# Altium PCB 2011_bms_slave_board.PcbDoc
Units mm, origin at the board's own origin, x right, y up, seen from the top; angles counter-clockwise.
Board outline 64 x 25 mm, 2 copper layers (Top Layer, Bottom Layer); 77 components, 77 nets, 239 pads, 64 vias.
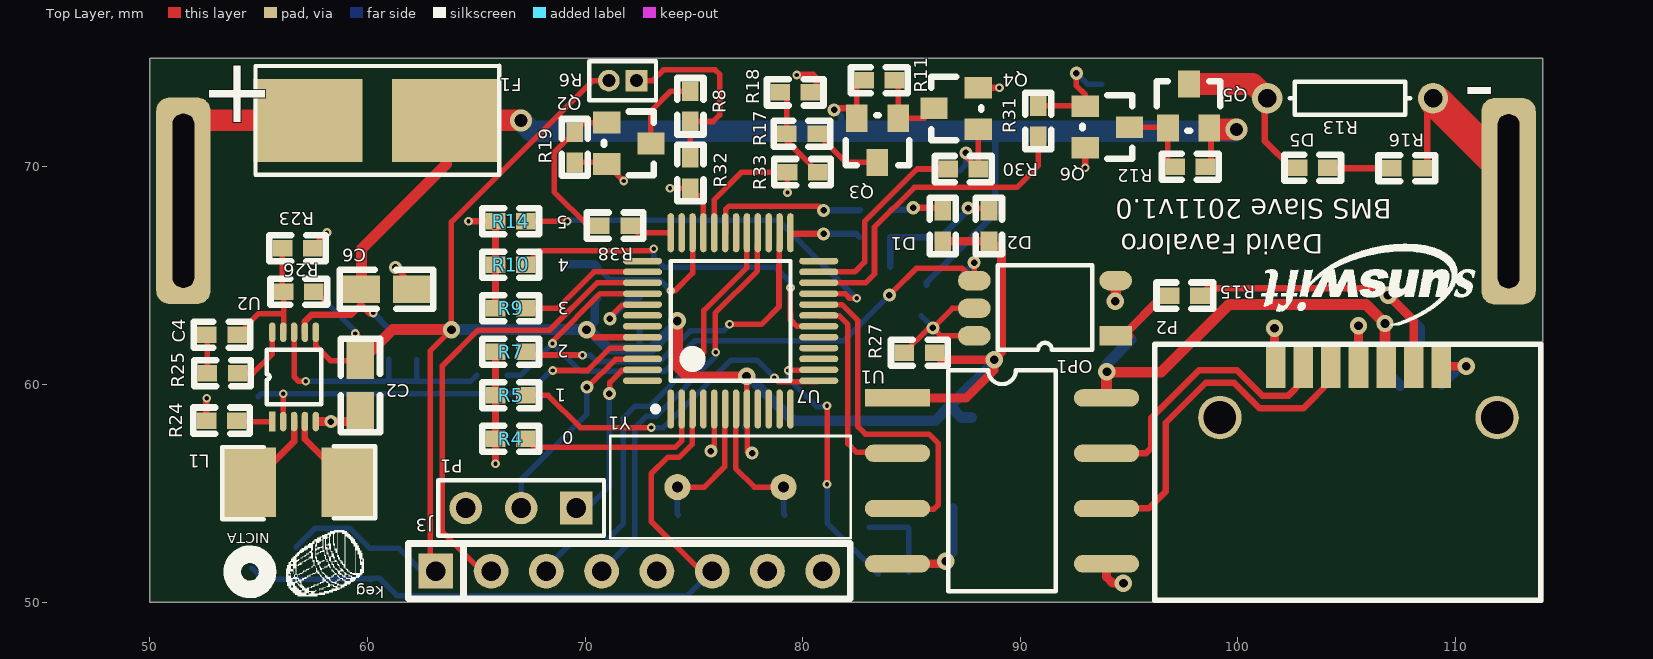
[diagram p0: Top Layer view]
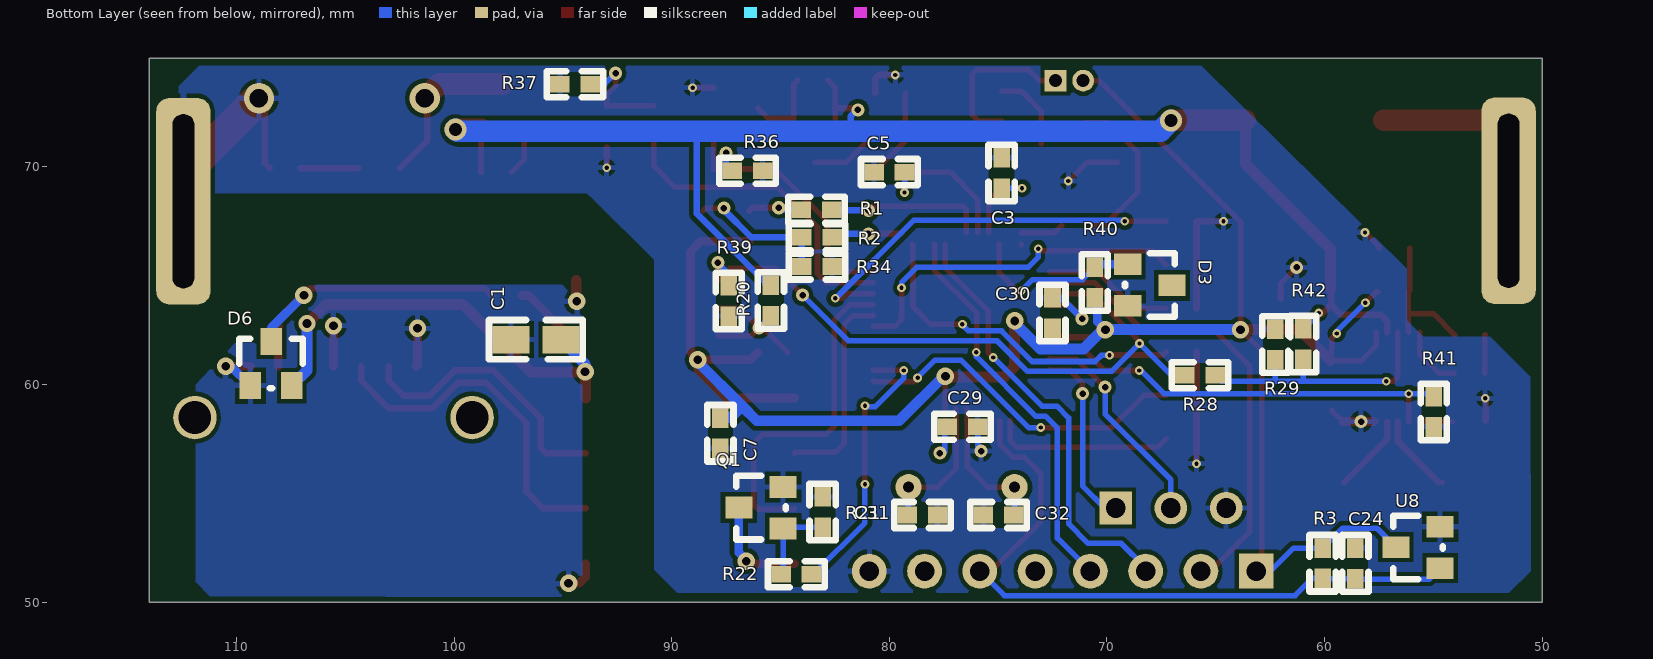
[diagram p1: Bottom Layer view, seen from below]

## Layer stack, top to bottom
Top Layer: signal copper 0.0356
Dielectric: dielectric 0.32, FR-4, Dk 4.8
Bottom Layer: signal copper 0.0356

## Board outline
50,50 50,75 114,75 114,50

## Design rules (kind name [scope] priority, off if disabled: settings)
Clearance [All] p1: gap=0.2
ComponentClearance [All] p1 off: gap=0.254 collisioncheckmode=3 verticalgap=0.254 showdistances=FALSE
HoleSize [All] p1: absolutevalues=TRUE maxlimit=2.54 minlimit=0 maxpercent=80.000 minpercent=20.000
MinimumAnnularRing [All] p1: minimumring=0.1
MinimumSolderMaskSliver [All] p1 off: minsoldermaskwidth=0.2
PolygonConnect [All] p1: connectstyle=Relief reliefconductorwidth=0.254 reliefentries=4 polygonreliefangle="90 Angle"
RoutingVias [All] p1: holewidth=0.2 width=0.4 viastyle="Through Hole" minholewidth=0.2 minwidth=0.4 maxholewidth=0.8 maxwidth=1
SilkToSilkClearance [All] p1 off: silktosilkclearance=0.2
SilkscreenOverComponentPads [All] p1 off: minsilkscreentomaskgap=0.254
SolderMaskExpansion [All] p1: expansion=0.102
TestPointUsage [All] p1: valid=0 allowmultiple=FALSE
Testpoint [All] p1: side=15 testpointundercomponent=TRUE minsize=1.016 maxsize=2.54 preferedsize=1.524 minholesize=0 maxholesize=1.016 preferedholesize=0.813 testpointgrid=0.025 style=1023 order=0-112345678
Width [All] p1: maxlimit=2 minlimit=0.254 preferedwidth=0.254
19 further rules are at their usual default settings.

## Classes and differential pairs
component class Battery: D5 F1 Q3 Q4 Q5 Q6 R11 R12 R13 R16 R17 R18 R30 R31 R36 R37
component class LPC11C14: C24 C29 C30 C31 C32 C33 J3 R3 U7 U8 Y1
component class PowerSupply: C2 C4 C6 L1 R23 R24 R25 R26 R29 R41 R42 U2
component class TopLevel: + - C1 C3 C5 C7 D1 D2 D3 D6 H1 H2 H3 H4 J1 OP1 P1 P2 P4 P? Q1 Q2 R1 R2 R4 R5 R6 R7 R8 R9 R10 R14 R15 R19 R20 R21 R22 R27 R28 R32 R33 R34 R38 R39 R40 U1

## Components (designator, comment, footprint, x,y, rotation, side; value= is the part's Value field where it differs from the comment)
+ "tab_connection" tab_connect 55.94,71.04 r90 top
- "tab_connection" tab_connect 116.84,71.02 r90 top
C1 "4.7uF" 0805 95.094,62.06 r0 bottom
C2 "4.7uF" 0805 59.674,61.096 r270 top
C3 "100nF" 0603 74.84,69.02 r90 bottom
C4 "1.5nF" 0603 52.62,62.28 r0 top
C5 "100nF" 0603 79.3,69.76 r0 bottom
C6 "4.7uF" 0805 59.73,64.372 r0 top
C7 "100nF" 0603 87.76,58.457 r270 bottom
C24 "10nF" 0603 58.58,51.08 r90 bottom
C29 "100nF" 0603 77.334,58.06 r180 bottom
C30 "100nF" 0603 72.5,63.977 r270 bottom
C31 "18pF" 0603 79.177,54 r180 bottom
C32 "18pF" 0603 74.283,54 r0 bottom
D1 "LED Orange" 0603_LED 87.09,66.03 r90 top
D2 "LED Red" 0603_LED 89.21,66.03 r90 top
D3 "LM4040" SOT23-3 69.04,65.52 r270 bottom
D5 "LED Green" 0603_LED 102.19,69.31 r0 top
D6 "BAV99" BAV99 110.015,59.248 r180 bottom
F1 "FUSE" LITTELFUSE-154 60.452,72.136 r180 top
J3 "LPC SWD Connector" IDC8 63.14,51.42 r0 top
L1 "4.7uH" 1812 59.094,55.508 r180 top
OP1 "VOM452T" VOM452T 95.134,62.18 r180 top
P1 "Header 3" HDR1X3 69.6,54.32 r180 top
P2 "SATA" 47080-4005-SATA 99.17,58.48 r0 top
Q1 "ZXM61N02F" SOT23-3 84.882,53.385 r90 bottom
Q2 "ZXM61N02F" SOT23-3 70.993,72.033 r270 top
Q3 "ZXM61P03F" SOT23-3 84.389,72.236 r180 top
Q4 "ZXM61N02F" SOT23-3 88.072,71.728 r90 top
Q5 "ZXM61P03F" SOT23-3 96.783,71.78 r0 top
Q6 "ZXM61N02F" SOT23-3 92.988,72.785 r270 top
R1 "100R" 0603 82.64,68.02 r0 bottom
R2 "100R" 0603 82.623,66.76 r0 bottom
R3 "10k" 0603 60.087,51.083 r90 bottom
R4 "0R" 0603 67.28,57.5 r180 top
R5 "0R" 0603 67.28,59.5 r180 top
R6 "NTC" MHDR1X2 72.36,73.96 r180 top
R7 "0R" 0603 67.28,61.5 r180 top
R8 "1K" 0603 74.84,72.083 r90 top
R9 "0R" 0603 67.28,63.5 r180 top
R10 "0R" 0603 67.28,65.5 r180 top
R11 "10k" 0603 82.82,73.98 r0 top
R12 "10k" 0603 97.112,70.003 r0 top
R13 "100R" AXIAL-0.3 105.156,73.152 r180 top
R14 "0R" 0603 67.28,67.5 r180 top
R15 "2k" 0603 96.861,64.083 r0 top
R16 "1k0" 0603 108.464,69.934 r180 top
R17 "10k0 1%" 0603 79.268,71.524 r0 top
R18 "30k, 1%" 0603 80.357,73.42 r180 top
R19 "10K" 0603 69.52,71.597 r270 top
R20 "0R" 0603 85.44,64.56 r270 bottom
R21 "10K" 0603 83.066,53.441 r90 bottom
R22 "100R" 0603 83.574,51.282 r0 bottom
R23 "200k" 0603 57.49,66.26 r180 top
R24 "20k" 0603 53.997,58.34 r180 top
R25 "15k" 0603 54.037,60.52 r180 top
R26 "340k" 0603 56.143,64.26 r0 top
R27 "0R" 0603 86.06,61.46 r180 top
R28 "0R" 0603 65.02,60.42 r0 bottom
R29 "10k" 0603 62.268,62.54 r270 bottom
R30 "100R" 0603 86.68,69.9 r0 top
R31 "100R" 0603 90.82,71.4 r90 top
R32 "1K" 0603 74.84,70.417 r270 top
R33 "1K" 0603 80.697,69.76 r180 top
R34 "100R" 0603 82.623,65.42 r0 bottom
R36 "10k" 0603 85.823,69.82 r0 bottom
R37 "10k" 0603 95.14,73.8 r180 bottom
R38 "100R" 0603 72.08,67.3 r180 top
R39 "1K" 0603 87.38,64.54 r270 bottom
R40 "1k" 0603 70.56,63.983 r90 bottom
R41 "10k" 0603 54.98,59.44 r270 bottom
R42 "10k" 0603 60.98,61.163 r90 bottom
U1 "ISO1050" SOP8 84.36,59.38 r0 top
U2 "LTC3440" MSOP10 55.626,58.296 r90 top
U7 "LPC11C14" QFP48-long 76,62.92 r90 top
U8 "XC61CN2002MR" SOT23-3 54.688,51.555 r90 bottom
Y1 "12 MHz" HC49/4H 71.155,55.28 r0 top

## Footprints (in the part's own frame and the unit in brackets; to place one, negate y for a bottom-side part, rotate by r counter-clockwise, add the part's x,y. Pads: shape width x height; smd on the part's side, far side on the other; paste and mask are expansions set on the pad)
0603 [mil]
  rect 35.43x30 smd: 1(0,0) 2(55,0)
  silkscreen extent -24,-24 79,24
0603_LED [mm]
  rect 0.9x0.762 smd: A(0.55,0.65) K(1.947,0.65)
  silkscreen extent -0.05,0.05 2.55,1.25
0805 [mm]
  rect 1.7x1.27 smd: 1(0,0) 2(2.286,0)
  silkscreen extent -1,-0.9 3.3,0.9
1812 [mm]
  rect 2.4x3.2 smd: 1(0,0) 2(4.5,0)
  silkscreen extent -1.27,-1.66 5.77,1.7
47080-4005-SATA [mm]
  round 2 hole 1.5: 0(0,0) 0(12.74,0)
  rect 0.9x2 smd: 1(2.56,2.36) 2(3.83,2.36) 3(5.1,2.36) 4(6.37,2.36) 5(7.64,2.36) 6(8.91,2.36) 7(10.18,2.36)
  silkscreen extent -3,-8.4 14.74,3.36
AXIAL-0.3 [mm] "Resistor; 2 Leads"
  round 1.4 hole 0.85: 1(-3.81,0) 2(3.81,0)
  silkscreen extent -2.77,-0.76 2.77,0.76
BAV99 [mm]
  rect 1x1.25 smd: A(0.65,0.7) C(1.615,2.732) K(2.555,0.7)
  silkscreen extent 0.14,0.57 3.06,2.86
HC49/4H [mm]
  round 1.2 hole 0.5: 1(3.085,0) 2(7.965,0)
  silkscreen extent 0,-2.35 11.05,2.35
HDR1X3 [mm] "Connector; Header; 3 Position"
  rect 1.5x1.5 hole 0.9: 1(0,0)
  round 1.5 hole 0.9: 2(2.54,0) 3(5.08,0)
  silkscreen extent -1.27,-1.27 6.35,1.27
IDC8 [mm]
  rect 1.6x1.6 hole 0.9: 1(0,0)
  round 1.6 hole 0.9: 2(2.54,0) 3(5.08,0) 4(7.62,0) 5(10.16,0) 6(12.7,0) 7(15.24,0) 8(17.78,0)
  silkscreen extent -1.27,-1.27 19.05,1.27
LITTELFUSE-154 [mm]
  rect 5x3.81 smd: 1(-3.185,0) 2(3.185,0)
  silkscreen extent -5.6,-2.51 5.6,2.5
MHDR1X2 [mm] "Connector; Header; 2 Position"
  rect 1x1 hole 0.6: 1(0,0)
  round 1 hole 0.6: 2(1.27,0)
  silkscreen extent -0.9,-0.9 2.17,0.9
MSOP10 [mm]
  rect 0.9x0.3 smd: 1(0,0)
  oval 0.9x0.3 smd: 2(0,-0.5) 3(0,-1) 4(0,-1.5) 5(0,-2) 6(4.1,-2) 7(4.1,-1.5) 8(4.1,-1) 9(4.1,-0.5) 10(4.1,0)
  silkscreen extent 0.8,-2.25 3.3,0.25
QFP48-long [mm]
  oval 1.8x0.3 smd: 1(-4.048,2.063) 2(-4.048,1.563) 3(-4.048,1.063) 4(-4.048,0.563) 5(-4.048,0.063) 6(-4.048,-0.437) 7(-4.048,-0.937) 8(-4.048,-1.437) 9(-4.048,-1.937) 10(-4.048,-2.437) 11(-4.048,-2.937) 12(-4.048,-3.437) 25(4.052,-3.437) 26(4.052,-2.937) 27(4.052,-2.437) 28(4.052,-1.937) 29(4.052,-1.437) 30(4.052,-0.937) 31(4.052,-0.437) 32(4.052,0.063) 33(4.052,0.563) 34(4.052,1.063) 35(4.052,1.563) 36(4.052,2.063)
  oval 0.3x1.8 smd: 13(-2.748,-4.737) 14(-2.248,-4.737) 15(-1.748,-4.737) 16(-1.248,-4.737) 17(-0.748,-4.737) 18(-0.248,-4.737) 19(0.252,-4.737) 20(0.752,-4.737) 21(1.252,-4.737) 22(1.752,-4.737) 23(2.252,-4.737) 24(2.752,-4.737) 37(2.752,3.363) 38(2.252,3.363) 39(1.752,3.363) 40(1.252,3.363) 41(0.752,3.363) 42(0.252,3.363) 43(-0.248,3.363) 44(-0.748,3.363) 45(-1.248,3.363) 46(-1.748,3.363) 47(-2.248,3.363) 48(-2.748,3.363)
  silkscreen extent -4.17,-3.44 2.75,2.89, body extent -3.5,-4.19 3.5,2.81, height 1.6
SOP8 [mm]
  rect 3x0.8 smd: 1(0,0)
  oval 3x0.8 smd: 2(0,-2.54) 3(0,-5.08) 4(0,-7.62) 5(9.6,-7.62) 6(9.6,-5.08) 7(9.6,-2.54) 8(9.6,0)
  silkscreen extent 2.33,-8.89 7.27,1.27
SOT23-3 [mm]
  rect 1x1.25 smd: 1(0,0) 2(1.905,0) 3(0.965,2.032)
  silkscreen extent -0.51,-0.13 2.41,2.16
tab_connect [mm]
  rrect50% 9.5x2.5 hole 1 slot 8 at 0 deg: 0(-2.6,4.4)
VOM452T [mm]
  rect 1.5x0.9 smd: 1(0.75,-0.05)
  oval 1.5x0.9 smd: 3(0.75,-2.59) 4(7.25,-2.59) 5(7.25,-1.32) 6(7.25,-0.05)
  silkscreen extent 1.84,-3.3 6.16,0.59

## Part data
C1 C2 C3 C4 C5 C6 C7 C24 C29 C30 C31 C32: library part CAP, "Capacitor"
D1 D2: library part LED
D5: library part LED, "HSMG-C170, Green LED"
D6: library part "DIODE SERIES 2", "diode, series connected"
F1: "Fuse"
J3: library part LPCLink_Connector
L1: library part Inductor, "Inductor"
P1: "Header, 3-Pin"
Q1 Q2 Q4 Q6: "1.7A, 20V N-Channel Enhancement mode FET"
Q3 Q5: "1.1A, 30V P-Channel Enhancement mode FET"
R1 R2 R3 R4 R5 R7 R8 R9 R10 R11 R12 R14 R15 R16 R17 R18 R19 R20 R21 R22 R23 R24 R25 R26 R27 R28 R29 R30 R31 R32 R33 R34 R36 R37 R38 R39 R40 R41 R42: library part RES1, "Resistor"
R6: "Thermistor, NTC"
R13: library part RES1, "Resistor, 100R, 1W, 10V"
U7: library part LPC11C14_Full
U8: library part XC61F, "SOT23 reset generator"
Y1: library part CRYSTAL, "Crystal"

## Free pads (board coordinates)
  round 0.809 on Top Overlay mask+0.2: 2(53.05,51.513)

## Via types
v1: diameter 0.4, hole 0.2, Top Layer to Bottom Layer, 29 vias
v2: diameter 0.6, hole 0.3, Top Layer to Bottom Layer, 15 vias
v3: diameter 0.8, hole 0.4, Top Layer to Bottom Layer, 14 vias
v4: diameter 0.6, hole 0.3, Top Layer to Bottom Layer, tented top, 2 vias
v5: diameter 1, hole 0.6, Top Layer to Bottom Layer, 2 vias
v6: diameter 0.4, hole 0.2, Top Layer to Bottom Layer, tented top, 2 vias

## Nets (pads, with @x,y where several pads share a name; then routed paths per layer and width w, separated by ;. In a path a pad name is that pad's centre, name@x,y a point inside that pad or via, vN(x,y) a via of type N, cw(c..) or ccw(c..) an arc to the next point about the centre after c; other vN are vias at no path point)
3V3: C2.1 C7.1 C29.1 C30.2 D1.A D2.A J3.1 R3.2 R6.2 R26.2 R27.1 R40.1 U1.1 U2.6 U7.8 U7.44 U8.3 | length 103.5
  Top Layer w0.254: R26.2 57.62,64.26 v1(58.12,63.76) ; U2.6 57.626,61.77 58.3,61.096 C2.1 C2.1@59.698,61.12 ; v1(59.443,62.343) 59.674,62.112 C2.1@59.698,61.12 ; C2.1@59.699,61.097 C2.1@59.698,61.12 ; C2.1@59.918,61.34 C2.1@59.698,61.12 ; J3.1 62.88,51.68 62.88,61.54 v3(63.86,62.52) 63.86,67.465 70.355,73.96 R6.2 ; v3@77.39,60.35 77.437,60.303 U7.8 ; U7.8@77.437,58.332 77.46,58.309 77.46,56.9 77.52,56.84 v4(77.68,56.84)
  Top Layer w0.3: C2.1 59.699,61.096 C2.1@59.736,61.096 ; v3(70.067,62.52) 70.416,62.172 U7.44
  Top Layer w0.4: U1.1 87.52,59.38 88.8,60.66 v3(88.8,61.14) ; R27.1 86.38,61.14 v3(88.8,61.14) ; D1.A D2.A 88.66,66.58 89.14,66.1 89.14,61.48 v3(88.8,61.14) ; v3@88.98,61.1 88.94,61.14 v3(88.8,61.14)
  Top Layer w0.5: C2.1@59.736,61.096 61.16,62.52 v3(63.86,62.52) ; v3(74.24,62.92) 74.24,60.821 74.711,60.35 v3@77.39,60.35
  Bottom Layer w0.254: U8.3 57.6,53.4 59.167,53.4 R3.2 61.42,52.48 J3.1@62.48,51.42 ; v1(58.12,63.76) 59.443,62.437 v1(59.443,62.343) ; 72.5,61.632 C30.2 ; C29.1 77.46,57.934 77.46,56.9 77.52,56.84 v4(77.68,56.84)
  Bottom Layer w0.4: v3(70.067,62.52) 70.44,62.893 70.44,63.863 R40.1
  Bottom Layer w0.5: v3(63.86,62.52) 68.221,62.52 ; 68.231,62.53 68.769,62.53 ; 68.779,62.52 v3(70.067,62.52) 70.18,62.52 71.068,61.632 72.5,61.632 73.052,61.632 v3@74.29,62.87 ; v3(77.42,60.38) 77.5,60.38 79.55,58.33 86.09,58.33 86.765,59.005 ; C7.1@87.76,58.48 87.289,58.48 86.765,59.005 ; v3(88.8,61.14) 88.8,61.04 86.765,59.005
/RESET: C24.1 J3.6 R3.1 U7.3 U8.1 | length 31.7
  Top Layer w0.254: U7.3@74.937,58.332 74.914,58.309 74.914,57.242 74.323,56.651 73.791,56.651 73.04,55.9 73.04,53.7 75.32,51.42 J3.6
  Bottom Layer w0.254: U8.1 55.188,51.055 58.555,51.055 C24.1 60.084,51.08 R3.1 ; R3.1@60.15,51.02 R3.1 ; J3.6 74.713,50.293 61.353,50.293 60.563,51.083 R3.1
BURSTMODE: R41.1 U2.2 U7.45 | length 20
  Top Layer w0.254: U2.2 v1(56.126,59.576) ; v1(68.52,60.64) 70.118,60.64 71.149,61.672 U7.45
  Bottom Layer w0.254: R41.1 55.116,59.576 v1(56.126,59.576) ; v1@56.182,59.52 v1(56.126,59.576) ; v1(68.52,60.64) 68.48,60.68 67.376,59.576 v1(56.126,59.576)
CAN_EN: R22.1 U7.14 | length 12.8
  Top Layer w0.254: v1(79.34,60.64) 79.34,60.62 79.368,60.649 80.714,60.649 U7.14 ; v6(81.12,55.42) v1(81.12,59.02)
  Bottom Layer w0.254: v1(79.34,60.64) 79.34,60.28 80.64,58.98 v1@81.08,58.98 ; v6(81.12,55.42) 81.12,53.64 R22.1@83.478,51.282
CAN_RX: U1.2 U7.19 | length 9.5
  Top Layer w0.254: U7.19 80.76,63.149 81.685,63.149 82.079,62.755 82.079,57.281 82.48,56.88 84.32,56.88 U1.2
CAN_TX: U1.3 U7.20 | length 15.8
  Top Layer w0.254: U7.20 81.804,63.672 82.533,62.943 82.533,58.067 82.88,57.72 85.8,57.72 86.22,57.3 86.22,54.46 86.02,54.26 84.4,54.26 U1.3
CANH: P2.2 U1.7 | length 12.9
  Top Layer w0.3: U1.7 95.78,56.84 96.02,57.08 96.02,58.46 98.22,60.66 99.947,60.66 101.117,59.49 102.325,59.49 103,60.165 P2.2
CANL: P2.3 U1.6 | length 16.2
  Top Layer w0.3: U1.6 95.9,54.3 96.68,55.08 96.68,58.24 98.52,60.08 99.82,60.08 101,58.9 103.005,58.9 104.27,60.165 P2.3
DISCHARGE: R31.1 U7.22 | length 14.9
  Top Layer w0.254: U7.22 82.892,64.672 83.3,65.08 83.3,67.227 85.133,69.06 89.84,69.06 90.82,70.04 R31.1
GND: -.0 C2.2 C3.2 C5.2 C6.2 C7.2 C24.2 C29.2 C30.1 C31.2 C32.2 D3.2 J3.8 P1.3 Q1.2 Q2.2 Q4.2 Q6.2 R4.2 R5.2 R7.2 R9.2 R10.2 R13.1 R14.2 R16.1 R18.1 R19.2 R21.2 R23.1 R24.2 R29.1 R34.1 R36.1 R37.1 R39.2 R41.2 U2.5 U7.5 U7.41 U8.2 | length 38.1
  Top Layer w0.254: R23.1 57.49,66.33 v1(58.14,66.98) ; C2.2@59.16,58.296 C2.2 ; v2(61.28,65.38) 62.016,64.644 C6.2 ; R19.2 70.921,70.2 Q2.2 v1(71.771,69.35) ; v2(71.14,63.02) 71.14,63.099 71.69,63.649 72.614,63.649 U7.41 ; v4(75.78,56.94) 75.82,56.94 75.937,57.057 U7.5@75.937,58.332 ; R13.1@108.7,72.886 R13.1
  Top Layer w0.3: R24.2 52.6,59.34 v1(52.62,59.36) ; C6.2@62.016,63.936 C6.2 ; v1(64.64,67.5) R14.2 R10.2 R9.2 ; v1(65.88,56.36) 65.883,56.363 R4.2 R5.2 R7.2 ; v1(79.72,74.22) 80.48,74.22 80.64,74.06 R18.1@80.64,73.38 ; Q4.2 89.033,73.633 v1(89.04,73.64) ; v1(92.988,69.96) Q6.2 ; R16.1 108.7,70.17 R13.1@108.7,72.886
  Top Layer w0.4: U2.5@57.72,58.296 v2(58.318,58.296) C2.2@59.16,58.296
  Top Layer w1: -.0 -.0@112.44,69.678
  Top Layer w1.5: R13.1@109.12,72.998 -.0@112.44,69.678
  Bottom Layer w0.254: v4(75.78,56.94) 75.937,57.097 C29.2
  Bottom Layer w0.3: v2(71.14,63.02) 72.097,63.977 C30.1
ID_0: R4.1 U7.2 | length 8.4
  Top Layer w0.254: R4.1 67.675,57.105 74.135,57.105 74.437,57.407 U7.2@74.437,58.332
ID_1: R5.1 U7.13 | length 15.8
  Top Layer w0.254: R5.1 68.3,59.5 69.78,58.02 v1(73.04,58.02) ; v1(78.7,60.3) 78.887,60.113 80.679,60.113 U7.13
  Bottom Layer w0.254: v1(73.04,58.02) 73.6,58.02 76.687,61.107 77.913,61.107 78.7,60.32 v1(78.7,60.3)
ID_2: R7.1 U7.26 | length 15.7
  Top Layer w0.254: R7.1 67.427,61.353 69.867,61.353 v1(69.88,61.34) ; v1(76.64,62.76) 78.1,62.76 78.91,63.57 78.91,65.48 78.914,65.484 78.914,66.409 U7.26@78.937,66.432
  Bottom Layer w0.254: v1(69.88,61.34) 70.26,61.34 70.545,61.055 73.435,61.055 74.841,62.461 76.369,62.461 76.64,62.732 v1(76.64,62.76)
ID_3: R9.1 U7.38 | length 6
  Top Layer w0.254: R9.1 68.735,63.5 70.407,65.172 U7.38
ID_4: R10.1 U7.18 | length 16.5
  Top Layer w0.254: R10.1 67.929,66.149 73.069,66.149 v1(73.16,66.24) ; v1(79.437,64.44) 79.437,63.243 79.44,63.24 79.44,62.98 79.748,62.672 U7.18
  Bottom Layer w0.254: v1(73.16,66.24) 73.16,65.84 73.62,65.38 78.74,65.38 79.437,64.683 v1(79.437,64.44)
ID_5: R14.1 U7.21 | length 18.5
  Top Layer w0.254: R14.1 v6(69.18,67.5) ; U7.21 81.946,64.172 82.158,63.96 v1(82.48,63.96)
  Bottom Layer w0.254: v6(69.18,67.5) 69.22,67.54 78.88,67.54 82.46,63.96 v1(82.48,63.96)
INTERRUPT_LINE: D6.C P2.6 R15.2 | length 15.4
  Top Layer w0.254: R15.2@98.275,64.1 R15.2@98.3,64.125 ; 106.58,64.42 v3@106.65,64.35
  Top Layer w0.3: R15.2 98.595,64.42 106.58,64.42
  Top Layer w0.4: v3@106.65,64.35 108.08,62.92 P2.6
  Bottom Layer w0.4: v3(106.9,64.1) 108.4,62.6 D6.C
ISOGND: C1.2 D6.A OP1.3 P2.1 P2.4 P2.7 U1.5 | length 8.9
  Top Layer w0.254: v3(94.36,63.82) v3@94.384,63.844 ; P2.7 P2.7@109.36,60.85
  Top Layer w0.4: U1.5 93.96,51.154 94.254,50.86 v3(94.74,50.86) ; v3(101.68,62.58) 101.68,60.89 P2.1 ; P2.4 v3(105.54,62.7) ; P2.7 v3(110.5,60.84)
  Top Layer w0.5: v3@94.384,63.844 OP1.3
  Bottom Layer w0.4: D6.A 110.257,60.84 v3(110.5,60.84) v3@110.427,60.913
ISOVCC: C1.1 D6.K P2.5 U1.8 | length 22.6
  Top Layer w0.5: U1.8 v3@93.96,60.56 ; v3(93.98,60.58) v3@93.96,60.56 ; P2.5 106.76,60.89 v3(106.76,62.8) 105.88,63.68 99.586,63.68 96.466,60.56 v3@93.96,60.56
  Bottom Layer w0.5: v3(93.98,60.58) 93.98,60.946 C1.1 ; v3@106.76,62.64 106.76,60.648 D6.K
Net+_0: +.0 F1.2 | length 4.7
  Top Layer w1: +.0@52.52,72.136 F1.2
NetC4_1: C4.1 R25.2 | length 1.8
  Top Layer w0.254: C4.1 52.64,62.26 R25.2
NetC4_2: C4.2 R23.2 R26.1 U2.9 | length 6.4
  Top Layer w0.254: C4.2 54.977,63.24 56.143,63.24 ; R23.2 56.093,64.31 R26.1 56.143,63.24 ; U2.9 56.143,62.413 56.143,63.24
NetD1_K: D1.K R1.2 | length 2.5
  Top Layer w0.3: v2(85.08,68.12) 86.297,68.12 D1.K
  Bottom Layer w0.254: v2@84.98,68.02 v2(85.08,68.12)
  Bottom Layer w0.3: R1.2 v2@84.98,68.02
NetD2_K: D2.K R2.2 R34.2 | length 6.5
  Top Layer w0.254: v2(87.6,68.1) 88.437,68.1 D2.K
  Bottom Layer w0.254: v2@87.6,68.02 v2(87.6,68.1)
  Bottom Layer w0.3: R34.2 R2.2 85.08,66.76 86.34,66.76 v2@87.6,68.02
NetD5_A: D5.A Q5.3 R13.2 | length 7.4
  Top Layer w0.3: R13.2@101.225,72.925 101.225,71.204 D5.A@102.495,69.934
  Top Layer w1: Q5.3 100.686,73.812 R13.2
NetD5_K: D5.K R16.2 | length 2.7
  Top Layer w0.3: D5.K@104.395,69.934 R16.2
NetL1_1: L1.1 U2.4 | length 3.6
  Top Layer w0.3: U2.4 57.126,57.476 L1.1
NetL1_2: L1.2 U2.3 | length 3.7
  Top Layer w0.254: L1.2 L1.2@54.758,55.508
  Top Layer w0.3: L1.2@54.758,55.508 56.626,57.376 U2.3
NetOP1_1: OP1.1 R15.1 | length 3.9
  Top Layer w0.4: OP1.1@95.008,62.23 OP1.1 94.72,62.23 96.573,64.083 R15.1
NetOP1_5: OP1.5 OP1.6 R20.2 R27.2 | length 6.9
  Top Layer w0.254: R27.2 85.803,62.6 v2(85.98,62.6) ; OP1.6 86.35,62.23 v2(85.98,62.6) ; OP1.5 86.88,63.5 v2(85.98,62.6)
  Bottom Layer w0.254: R20.2 85.98,62.623 v2(85.98,62.6)
NetQ1_1: Q1.1 R21.1 R22.2 | length 3.8
  Bottom Layer w0.254: R21.1 Q1.1@84.826,53.441 ; R22.2@84.882,51.371 Q1.1
NetQ1_3: Q1.3 U1.4 | length 4.9
  Top Layer w0.4: U1.4 86.46,51.76 v3(86.58,51.88)
  Bottom Layer w0.4: v3(86.58,51.88) 86.58,51.94 86.914,52.274 Q1.3
NetQ2_1: Q2.1 R19.1 R38.2 | length 7.5
  Top Layer w0.254: R38.2 70.125,67.3 68.58,68.845 68.58,70.657 R19.1 69.956,72.033 Q2.1
NetQ2_3: Q2.3 R8.2 | length 3.7
  Top Layer w0.254: Q2.3 73.025,72.568 73.937,73.48 R8.2
NetQ3_1: Q3.1 Q4.3 R11.2 | length 3.7
  Top Layer w0.254: R11.2 84.389,73.808 Q3.1 85.583,72.236 Q4.3
NetQ3_3: Q3.3 R17.2 | length 3.3
  Top Layer w0.254: R17.2 81.985,70.204 Q3.3
NetQ4_1: Q4.1 R30.2 R36.2 | length 3.8
  Top Layer w0.254: v2(87.5,70.64) 87.468,70.608 87.468,70.509 R30.2 88.077,71.723 Q4.1
  Bottom Layer w0.254: R36.2 87.5,70.1 v2(87.5,70.64)
NetQ5_1: Q5.1 Q6.3 R12.1 | length 4.1
  Top Layer w0.254: Q6.3 96.743,71.82 Q5.1 96.783,70.332 R12.1@97.367,69.748
NetQ6_1: Q6.1 R31.2 R37.2 | length 5.2
  Top Layer w0.254: R31.2 92.976,72.797 Q6.1 92.988,73.312 92.58,73.72 v2(92.58,74.3)
  Bottom Layer w0.254: v2(92.58,74.3) 93.08,73.8 R37.2
NetR24_1: R24.1 U2.1 | length 1.5
  Top Layer w0.254: R24.1@54.14,58.296 U2.1
NetR25_1: R25.1 U2.10 | length 2.9
  Top Layer w0.254: R25.1 54.74,60.52 55.626,61.406 U2.10
NetU7_1: U7.1
NetU7_4: U7.4
NetU7_9: U7.9
NetU7_10: U7.10
NetU7_11: U7.11
NetU7_12: U7.12
NetU7_15: U7.15
NetU7_16: U7.16
NetU7_17: U7.17
NetU7_24: U7.24
NetU7_27: U7.27
NetU7_30: U7.30
NetU7_35: U7.35
NetU7_37: U7.37
NetU7_42: U7.42
NetU7_43: U7.43
NetU7_48: U7.48
ORANGE_LED: R1.1 U7.31 | length 7.4
  Top Layer w0.254: U7.31 76.46,66.995 76.46,68.04 76.619,68.199 80.761,68.199 v2(80.96,68)
  Bottom Layer w0.254: R1.1@82.62,68 R1.1
  Bottom Layer w0.3: v2(80.96,68) R1.1@82.62,68
RED_LED: R2.1 U7.25 | length 3.3
  Top Layer w0.3: U7.25 79.489,66.92 v2(80.96,66.92)
  Bottom Layer w0.254: R2.1@82.463,66.92 R2.1
  Bottom Layer w0.3: v2(80.96,66.92) R2.1@82.463,66.92
REF_SENSE: D3.1 R40.2 U7.34 | length 8.1
  Top Layer w0.254: v1(73.937,64.3) 74.12,64.3 74.937,65.117 U7.34@74.937,66.432
  Bottom Layer w0.254: R40.2 71.12,64.82 73.417,64.82 v1(73.937,64.3)
  Bottom Layer w0.4: D3.1 70.42,65.52 R40.2
RX: P1.2 U7.46 | length 9.9
  Top Layer w0.254: v2(70.08,59.88) 70.12,59.88 71.388,61.149 72.614,61.149 U7.46
  Bottom Layer w0.254: P1.2 67.06,55.62 70.08,58.64 v2(70.08,59.88)
SHUTDOWN: R28.1 R29.2 R42.1 U2.8 | length 12.6
  Top Layer w0.254: U2.8 56.626,60.354 56.84,60.14 v1(57.16,60.14)
  Bottom Layer w0.254: v1(57.16,60.14) 60.98,60.14 ; R42.1 60.98,60.14 ; 62.268,60.172 R29.2 ; R28.1 64.74,60.14 60.98,60.14
TCLK: J3.3 U7.29 | length 20.6
  Top Layer w0.254: v1(75.22,61.24) 75.46,61.48 75.46,63.402 77.437,65.379 U7.29@77.437,66.432
  Bottom Layer w0.254: J3.3@67.56,51.42 J3.3@68.06,51.42 ; J3.3 68.22,51.58 69.34,52.7 70.86,52.7 71.76,53.6 71.76,58.46 72.301,59.001 72.981,59.001 v1(75.22,61.24)
TDO: J3.4 U7.28 | length 18.6
  Top Layer w0.254: v1@75.98,61.5 75.98,63.28 77.914,65.214 77.914,66.409 U7.28@77.937,66.432
  Bottom Layer w0.254: J3.4@70.1,51.42 J3.4@70.42,51.42 ; J3.4 72.28,52.94 72.28,58.005 72.822,58.547 73.272,58.547 76,61.275 v1(76,61.48)
TEMP_SENSE: C3.1 R32.2 U7.33 | length 4.2
  Top Layer w0.254: v1(73.9,69.02) R32.2 75.437,68.423 U7.33
  Bottom Layer w0.254: v1(73.9,69.02) C3.1
TEMP_SENSE_EN: R38.1 U7.36 | length 2
  Top Layer w0.254: R38.1 72.408,66.972 U7.36 ; U7.36@73.926,66.42 U7.36@73.937,66.432
TEMP_SENSE_IN: R6.1 R8.1 R32.1 | length 9.1
  Top Layer w0.254: R6.1 73.1,73.96 73.6,74.46 75.98,74.46 76.18,74.26 76.18,72.38 75.883,72.083 R8.1 R32.1
TMS: J3.2 U7.39 | length 21.4
  Top Layer w0.254: J3.2 65.24,51.42 63.44,53.22 63.44,60.86 65.08,62.5 68.377,62.5 70.549,64.672 U7.39
TX: P1.1 U7.47 | length 8.4
  Top Layer w0.254: v2(71.12,59.58) 71.14,59.6 71.14,60.099 71.69,60.649 72.614,60.649 U7.47
  Bottom Layer w0.254: P1.1 70.1,54.32 71.12,55.34 v2(71.12,59.58)
VIN: C6.1 F1.1 Q3.2 Q5.2 R11.1 R12.2 R20.1 R42.2 U2.7 | length 70.2
  Top Layer w0.254: Q3.2 82.484,72.696 82.484,73.644 R11.1 ; Q5.2 Q5.2@98.748,71.72 ; R12.2@98.764,69.748 Q5.2@98.764,71.704
  Top Layer w0.3: U2.7 57.126,62.903 57.419,63.196 59.234,63.196 59.699,63.661 ; C6.1 59.699,64.341 59.699,63.661 ; v1(60.26,63.28) 60.08,63.28 59.699,63.661 ; v2(81.44,72.62) 81.439,72.621 81.439,72.651 81.484,72.696 Q3.2@82.484,72.696
  Top Layer w0.4: C6.1 59.73,65.41 ; F1.1@63.637,70.517 F1.1
  Top Layer w0.5: C6.1 59.73,66.23 63.637,70.137 F1.1
  Top Layer w1: F1.1 v5@67.047,72.136 ; Q5.2@98.748,71.72 v5(99.94,71.72)
  Bottom Layer w0.3: v1(60.26,63.28) R42.2 ; v2(81.44,72.62) 81.44,72.621 81.454,72.635 81.474,72.635 81.78,72.329 81.78,71.68 81.82,71.64 ; R20.1@85.7,64.577 85.7,64.7 88.84,67.84 88.84,71.54 88.94,71.64
  Bottom Layer w1: v5@67.047,72.136 v5(67.05,72.133) 67.543,71.64 81.82,71.64 88.94,71.64 99.86,71.64 v5(99.94,71.72)
VOLT_SENSE: C5.1 R33.2 U7.32 | length 7.3
  Top Layer w0.254: U7.32 75.937,68.497 77.2,69.76 R33.2 v1(79.3,68.82)
  Bottom Layer w0.254: v1(79.3,68.82) C5.1
VOLT_SENSE_EN: R30.1 U7.23 | length 9
  Top Layer w0.254: U7.23 82.392,65.172 82.846,65.626 82.846,67.486 85.26,69.9 R30.1
VOLT_SENSE_IN: R17.1 R18.2 R33.1 | length 4.4
  Top Layer w0.254: R17.1@79.141,71.651 R17.1 ; R18.2@79.243,73.38 79.268,73.355 R17.1 ; R33.1 79.268,71.189 R17.1
WAKEUP: OP1.4 R28.2 R39.1 U7.40 | length 31.9
  Top Layer w0.254: v1@68.501,61.982 70.691,64.172 U7.40 ; v2(83.98,64.1) 84.24,64.36 85.22,65.34 87.314,65.34 OP1.4 87.884,65.596 v2(87.88,65.6)
  Bottom Layer w0.254: R28.2 67.04,60.42 v1(68.5,61.88) 69.779,60.601 73.641,60.601 75.047,62.007 76.218,62.007 76.225,62 81.88,62 v2(83.98,64.1) ; R39.1 87.38,65.1 v2(87.88,65.6)
XTALIN: C32.1 U7.6 Y1.1 | length 6.5
  Top Layer w0.254: Y1.1 75.48,55.28 76.419,56.219 76.419,58.853 U7.6 ; U7.6@76.437,58.332 U7.6@76.447,58.322
  Bottom Layer w0.254: Y1.1 74.24,54.043 C32.1
XTALOUT: C31.1 U7.7 Y1.2 | length 6.6
  Top Layer w0.254: U7.7 76.914,58.849 76.914,56.146 77.78,55.28 Y1.2
  Bottom Layer w0.254: Y1.2 79.12,54.057 C31.1
pads on no net: D3.3 J3.5 J3.7 P2.0

## Polygon pours and split planes (outlines as drawn)
GND on Bottom Layer "GND-TAB" (solid, pour order 1001): 50.53,51.41 51.524,50.43 89.745,50.43 90.669,51.34 90.811,51.48 90.811,65.48 90.811,65.74 93.59,68.48 93.894,68.78 112.66,68.78 112.66,73.7 111.889,74.46 111.711,74.636 65.817,74.636 65.67,74.636 56.342,65.44 56.224,65.323 56.224,63.02 56.224,62.944 55.64,62.368 55.456,62.187 52.393,62.187 50.54,60.36
ISOGND on Bottom Layer "GND-TAB" (solid, pour order 1000): 111.236,50.276 111.844,50.915 111.88,50.915 111.88,59.994 110.056,61.911 109.216,61.911 106.677,64.58 95.038,64.58 94.234,63.734 94.12,63.615 94.12,51.41 94.12,51.072 94.931,50.22

## Silkscreen, mask and mechanical layers (free items; w line width, h text height)
Top Overlay:
  drawing of 1661 lines, arcs and shapes, not listed
  text "BMS Slave 2011v1.0" at 107.08,68.52 h0.9 r180
  text "5" at 69.2,67.76 h0.6 r180
  text "David Favaloro" at 103.92,66.9 h0.9 r180
  text "4" at 69.28,65.78 h0.6 r180
  text "3" at 69.28,63.8 h0.6 r180
  text "2" at 69.24,61.82 h0.6 r180
  text "1" at 69.14,59.8 h0.6 r180
  text "0" at 68.94,57.26 h0.6
  text "NICTA" at 55.513,53.333 h0.82 r180
  text "keg" at 60.78,50.92 h0.88 r180
Mechanical 1:
  the board outline again, w0.254
  text "Ready for Manufacture 11/09/11" at 61.168,83.246 h1.52